# Allegro board sophum_esc_v2.brd
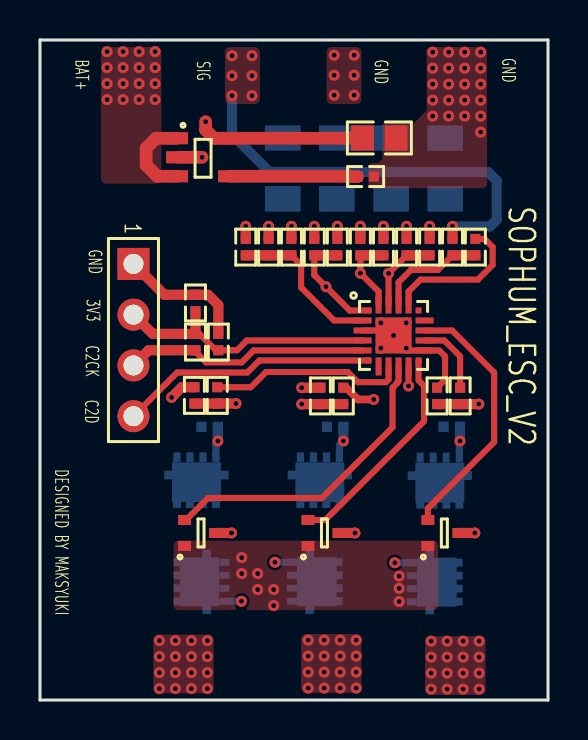
[diagram p0: board, top side]
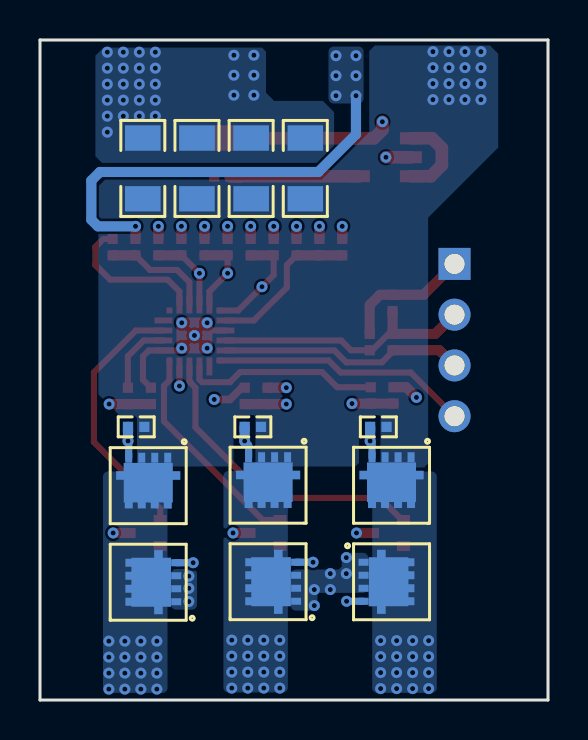
[diagram p1: board, bottom side, seen from below]

Outline 25.4 x 33.02 mm; copper layers: TOP, SIG02, GND03, BOTTOM. Coordinates in mm from the lower left corner of the outline.
Outline path: 0,33.02 0,0 25.4,0 25.4,33.02 0,33.02

## Placement (name value [footprint] x y rotation side)
C1  47uF 10%  [C1206]  14.84 26.59 90 bottom
C2  47uF 10%  [C1206]  12.14 26.59 90 bottom
C3  47uF 10%  [C1206]  17.55 26.59 90 bottom
C4  47uF 10%  [C1206]  20.26 26.59 90 bottom
C5  1nF 10%  [C0402]  16.28 26.19 0 top
C6  22uF 6.3V  [C0805]  16.97 28.12 0 top
C7  4.7uF 10%  [C0402]  7.77 19.86 270 top
C8  4.7uF 10%  [C0402]  8.92 17.91 270 top
J1  DEBUG  [HDR4X1-2R54-TM-VM]  4.67 21.82 270 top
Q1  AON7409  [DFN-3X3-5-0R50X0R35]  7.82 10.74 0 bottom
Q2  AON7409  [DFN-3X3-5-0R50X0R35]  14 10.75 0 bottom
Q3  AON7409  [DFN-3X3-5-0R50X0R35]  19.99 10.72 0 bottom
Q4  DTC143ZUAT106  [SOT-23-3-0R65X0R50]  8 8.36 270 top
Q5  DTC143ZUAT106  [SOT-23-3-0R65X0R50]  14.17 8.36 270 top
Q6  DTC143ZUAT106  [SOT-23-3-0R65X0R50]  20.17 8.36 270 top
Q7  AON7544  [DFN-3X3-5-0R50X0R35]  7.82 5.92 270 bottom
Q8  AON7544  [DFN-3X3-5-0R50X0R35]  14 5.92 90 bottom
Q9  AON7544  [DFN-3X3-5-0R50X0R35]  19.99 5.89 90 bottom
R1  4.7K 1%  [R0402]  20.62 22.66 90 top
R2  2K 1%  [R0402]  19.48 22.66 270 top
R3  2K 1%  [R0402]  17.17 22.66 270 top
R4  1K 1%  [R0402]  21.77 22.66 90 top
R5  2K 1%  [R0402]  14.87 22.66 270 top
R6  1K 1%  [R0402]  13.71 22.66 90 top
R7  1K 1%  [R0402]  16.02 22.66 90 top
R8  1K 1%  [R0402]  18.33 22.66 90 top
R9  10K 1%  [R0402]  10.29 22.66 270 top
R10  10K 1%  [R0402]  11.43 22.66 270 top
R11  10K 1%  [R0402]  12.57 22.66 270 top
R12  10K 1%  [R0402]  7.77 17.91 270 top
R13  75R 1%  [R0402]  8.48 13.67 0 bottom
R14  75R 1%  [R0402]  14.76 13.67 0 bottom
R15  75R 1%  [R0402]  20.59 13.67 0 bottom
R16  75R 1%  [R0402]  8.86 15.24 270 top
R17  75R 1%  [R0402]  15.16 15.21 270 top
R18  75R 1%  [R0402]  21.01 15.21 270 top
R19  10K 1%  [R0402]  7.72 15.24 90 top
R20  10K 1%  [R0402]  14.02 15.21 90 top
R21  10K 1%  [R0402]  19.85 15.21 90 top
U1  AP2210K-3.3TRG1  [SOT-23-5-1R10X0R60]  8.15 27.15 0 top
U2  EFM8BB21F16G  [QFN-20-0R50-3X3EP1R80X1R80]  17.68 18.24 0 top

## Library data of the parts
C1-C5 C7 C8 = CAPACITOR-NON-POL
C6 = CAPACITOR-POL
J1 = HEADER-4X1
Q1-Q3 = AON7409
Q4-Q6 = DTC143ZUAT106
Q7-Q9 = AON7544
R1-R21 = RESISTOR
U1 = AP2210K-3.3TRG1
U2 = EFM8BB21F16G

## Footprints (pads in the part's own frame, mm; a bottom-side part is the same pattern mirrored in y, then rotated)
C0402
  rect 0.51x0.51 smd: 1(-0.41,0) 2(0.41,0)
C0805
  rect 1.14x1.27 smd: 1(-0.84,0) 2(0.84,0)
C1206
  rect 1.27x1.78 smd: 1(-1.52,0) 2(1.52,0)
DFN-3X3-5-0R50X0R35
  rect 0.35x0.5 smd: 1(-0.975,-1.4) 2(-0.325,-1.4) 3(0.325,-1.4) 4(0.975,-1.4)
  custom 3.21x2.28 smd: 5(0,0)
HDR4X1-2R54-TM-VM
  rect 1.6x1.6 hole 1: 1(0,0)
  round 1.6 hole 1: 2(2.54,0) 3(5.08,0) 4(7.62,0)
QFN-20-0R50-3X3EP1R80X1R80
  rect 0.3x0.3 smd: 1(-1.25,1.25) 6(-1.25,-1.25) 11(1.25,-1.25) 16(1.25,1.25)
  rect 0.9x0.3 smd: 2(-1.55,0.75) 3(-1.55,0.25) 4(-1.55,-0.25) 5(-1.55,-0.75) 12(1.55,-0.75) 13(1.55,-0.25) 14(1.55,0.25) 15(1.55,0.75)
  rect 0.3x0.9 smd: 7(-0.75,-1.55) 8(-0.25,-1.55) 9(0.25,-1.55) 10(0.75,-1.55) 17(0.75,1.55) 18(0.25,1.55) 19(-0.25,1.55) 20(-0.75,1.55)
  rect 1.8x1.8 smd: 21(0,0)
R0402
  rect 0.51x0.51 smd: 1(-0.41,0) 2(0.41,0)
SOT-23-3-0R65X0R50
  rect 0.5x0.65 smd: 1(0.65,-0.775) 2(-0.65,-0.775) 3(0,0.775)
SOT-23-5-1R10X0R60
  rect 1.1x0.6 smd: 1(-1.3,0.95) 2(-1.3,0) 3(-1.3,-0.95) 4(1.3,-0.95) 5(1.3,0.95)

## Nets
GND: C1.2 C2.2 C3.2 C4.2 C5.2 C6.2 C7.1 C8.1 J1.1 Q4.1(E) Q5.1(E) Q6.1(E) Q7.1(S#1) Q7.2(S#2) Q7.3(S#3) Q8.1(S#1) Q8.2(S#2) Q8.3(S#3) Q9.1(S#1) Q9.2(S#2) Q9.3(S#3) R6.2 R7.2 R8.2 R19.2 R20.2 R21.2 U1.2(GND) U2.3(GND#3) U2.12(GND#12) U2.21(GND#21)
VBAT: C1.1 C2.1 C3.1 C4.1 Q1.1(S#1) Q1.2(S#2) Q1.3(S#3) Q2.1(S#1) Q2.2(S#2) Q2.3(S#3) Q3.1(S#1) Q3.2(S#2) Q3.3(S#3) R13.1 R14.1 R15.1 U1.1(VIN) U1.3(EN)
VCC_3V3: C6.1 C7.2 C8.2 J1.2 R12.1 U1.5(VOUT) U2.4(VDD)
S: R1.2
U: Q1.5(D) Q7.5(D) R2.1
V: Q2.5(D) Q8.5(D) R3.1
W: Q3.5(D) Q9.5(D) R5.1
N00617: R9.2 R10.2 R11.2 U2.2(P0.0)
N00683: R5.2 R6.1 R9.1 U2.1(P0.1)
N00695: R3.2 R7.1 R10.1 U2.20(P0.2)
N00702: R2.2 R8.1 R11.1 U2.19(P0.3)
N01197: J1.3 R12.2 U2.5(RSTB/C2CK)
N01206: J1.4 U2.6(P2.0/C2D)
N02496: C5.1 U1.4(BYP/ADJ)
N02921: Q9.4(G) R18.2 R21.1
N03269: Q3.4(G) Q6.3(C) R15.2
N05304: Q7.4(G) R16.2 R19.1
N05422: Q1.4(G) Q4.3(C) R13.2
N07149: Q8.4(G) R17.2 R20.1
N07267: Q2.4(G) Q5.3(C) R14.2
N09542: R16.1 U2.8(P1.5)
N09554: Q4.2(B) U2.9(P1.4)
N09583: R17.1 U2.10(P1.3)
N10131: Q5.2(B) U2.11(P1.2)
N10444: R18.1 U2.13(P1.1)
N10471: Q6.2(B) U2.14(P1.0)
N10995: R1.1 R4.1 U2.18(P0.4)
N10999: R4.2 U2.17(P0.5)

Pads without a net: U2 7 15 16

## Via types
v1: diameter 0.55, hole 0.254, TOP to BOTTOM, 142 vias

## Routing (per net, layer and track width the routed paths; a pad name or vN(x,y) marks a point on that pad's centre or on a via; arc(x,y) is an arc through that point)
GND: length 25.3
  TOP w0.305: v1(18.31,17.6) 18.43,17.49 U2.12 19.96,17.49 20.25,17.19 20.25,16.02 R21.2 ; U2.3 17.43,18.49 v1(17.68,18.24)
  TOP w0.508: J1.1 6.22,20.27 C7.1 8.4,20.27 8.92,19.76 C8.1 ; v1(6.58,15.14) 7.09,15.65 R19.2 ; R7.2 v1(16.02,23.7) ; R8.2 v1(18.33,23.7) ; R6.2 v1(13.71,23.7) ; R20.2 v1(13.08,15.62)
  TOP w0.635: U1.2 v1(8.1,27.15)
  SIG02 w0.152: J1.1 5.65,21.82 ; J1.1 3.7,21.82 ; J1.1 4.67,22.8 ; J1.1 4.67,20.84
  GND03 w0.635: J1.1 3.7,21.82 ; J1.1 4.67,20.84 ; J1.1 5.65,21.82 ; J1.1 4.67,22.8
  vias: v1(10.08,7.12) v1(10.08,6.32) v1(10.88,6.32) v1(10.88,5.52) v1(11.68,5.52) v1(11.68,4.72) v1(14.71,32.26) v1(14.71,31.26) v1(14.71,30.26) v1(15.71,32.26) v1(15.71,31.26) v1(15.71,30.26) v1(17.04,18.87) v1(17.04,17.6) v1(17.96,6.2) v1(17.96,5.59) v1(17.96,4.93) v1(18.31,18.87) v1(19.63,32.41) v1(19.63,31.61) v1(19.63,30.81) v1(19.63,30.01) v1(19.63,29.21) v1(20.43,32.41) v1(20.43,31.61) v1(20.43,30.81) v1(20.43,30.01) v1(20.43,29.21) v1(21.23,32.41) v1(21.23,31.61) v1(21.23,30.81) v1(21.23,30.01) v1(21.23,29.21) v1(22.03,32.41) v1(22.03,31.61) v1(22.03,30.81) v1(22.03,30.01) v1(22.03,29.21) v1(22.03,28.41)
VBAT: length 4.4
  TOP w0.635: U1.3 5.86,26.2 5.31,26.75 5.31,27.61 5.8,28.1 U1.1
  vias: v1(3.35,32.44) v1(3.35,31.64) v1(3.35,30.84) v1(3.35,30.04) v1(4.15,32.44) v1(4.15,31.64) v1(4.15,30.84) v1(4.15,30.04) v1(4.95,32.44) v1(4.95,31.64) v1(4.95,30.84) v1(4.95,30.04) v1(5.75,32.44) v1(5.75,31.64) v1(5.75,30.84) v1(5.75,30.04)
VCC_3V3: length 38.2
  TOP w0.305: U2.4 10.34,17.99 9.85,17.5 C8.2 8.79,17.5 7.97,18.32 R12.1
  TOP w0.508: J1.2 5.64,18.32 R12.1 C7.2
  TOP w0.635: C6.1 15.35,28.12 15.34,28.1 U1.5 8.7,28.1 8.28,28.52 v1(8.28,28.93)
  SIG02 w0.635: J1.2 3.43,19.28 2.59,20.12 2.59,27.74 3.78,28.93 v1(8.28,28.93)
S: length 21.1
  TOP w0.508: R1.2 v1(20.62,23.7)
  BOTTOM w0.508: v1(9.6,30.23) 9.6,28.3 11.48,26.42 22.4,26.42 22.83,25.98 22.83,24.03 22.5,23.7 v1(20.62,23.7)
  vias: v1(9.6,32.23) v1(9.6,31.23) v1(10.6,32.23) v1(10.6,31.23) v1(10.6,30.23)
U: length 29.4
  TOP w0.508: R2.1 v1(19.48,23.7)
  SIG02 w0.381: v1(6.77,2.97) 7.29,3.49 7.29,14.35 8.35,15.41 9.54,15.41 9.56,15.42 10.09,15.42 15.01,20.35 18.01,20.35 19.48,21.82 v1(19.48,23.7)
  vias: v1(5.97,2.97) v1(5.97,2.17) v1(5.97,1.37) v1(5.97,0.57) v1(6.77,2.17) v1(6.77,1.37) v1(6.77,0.57) v1(7.57,2.97) v1(7.57,2.17) v1(7.57,1.37) v1(7.57,0.57) v1(8.37,2.97) v1(8.37,2.17) v1(8.37,1.37) v1(8.37,0.57)
V: length 30.3
  TOP w0.508: R3.1 v1(17.17,23.7)
  SIG02 w0.381: v1(14.21,3) 14.21,17.51 16.26,19.56 18.31,19.56 21.22,22.46 21.22,23.94 20.68,24.49 17.96,24.49 v1(17.17,23.7)
  vias: v1(13.41,3) v1(13.41,2.2) v1(13.41,1.4) v1(13.41,0.6) v1(14.21,2.2) v1(14.21,1.4) v1(14.21,0.6) v1(15.01,3) v1(15.01,2.2) v1(15.01,1.4) v1(15.01,0.6) v1(15.81,3) v1(15.81,2.2) v1(15.81,1.4) v1(15.81,0.6)
W: length 32.1
  TOP w0.508: R5.1 v1(14.87,23.7)
  SIG02 w0.381: v1(21.96,2.95) 23.6,4.58 23.6,23.57 21.84,25.32 16.49,25.32 v1(14.87,23.7)
  vias: v1(19.56,2.95) v1(19.56,2.15) v1(19.56,1.35) v1(19.56,0.55) v1(20.36,2.95) v1(20.36,2.15) v1(20.36,1.35) v1(20.36,0.55) v1(21.16,2.95) v1(21.16,2.15) v1(21.16,1.35) v1(21.16,0.55) v1(21.96,2.15) v1(21.96,1.35) v1(21.96,0.55)
N00617: length 7.9
  TOP w0.305: R11.2 13.06,21.76 13.06,20.64 14.71,18.99 U2.2
  TOP w0.508: R9.2 R10.2 R11.2
N00683: length 11.5
  TOP w0.305: R6.1 13.71,21.26 v1(14.3,20.68) 15.49,19.49 U2.1
  TOP w0.508: R9.1 v1(10.29,23.7) ; R6.1 R5.2
  SIG02 w0.305: v1(14.3,20.68) 13.31,20.68 v1(10.29,23.7)
N00695: length 10.2
  TOP w0.305: U2.20 16.93,20.44 v1(16.02,21.35) R7.1
  TOP w0.508: R10.1 v1(11.43,23.7) ; R7.1 R3.2
  SIG02 w0.305: v1(11.43,23.7) 11.63,23.7 13.98,21.35 v1(16.02,21.35)
N00702: length 10.4
  TOP w0.305: R8.1 v1(17.43,21.35) U2.19
  TOP w0.508: R11.1 v1(12.57,23.7) ; R8.1 R2.2
  SIG02 w0.305: v1(12.57,23.7) 14.33,21.95 16.83,21.95 v1(17.43,21.35)
N01197: length 12.3
  TOP w0.305: R12.2 7.77,17.42 8.31,16.89 10.08,16.89 10.68,17.49 U2.5
  TOP w0.508: R12.2 5.43,17.5 J1.3
N01206: length 12.9
  TOP w0.305: U2.6 10.97,16.99 10.36,16.38 6.86,16.38 J1.4
N02496: length 6.4
  TOP w0.635: U1.4 15.4,26.2 15.41,26.19 C5.1
N02921: length 13.2
  TOP w0.508: R21.1 R18.2 v1(21.94,14.8)
  SIG02 w0.508: v1(21.94,14.8) 20.93,14.8 17.74,11.62 v1(17.74,6.87)
  BOTTOM w0.356: Q9.4 v1(17.74,6.87)
N03269: length 7.3
  TOP w0.508: Q6.3 v1(21.74,8.36)
  SIG02 w0.508: v1(21.74,8.36) 21.74,12.22 v1(21,12.96)
  BOTTOM w0.356: v1(21,12.96) 20.96,12.92 Q3.4
  BOTTOM w0.508: R15.2 v1(21,12.96)
N05304: length 15.6
  TOP w0.508: R19.1 R16.2 v1(9.8,14.83)
  SIG02 w0.508: v1(9.8,14.83) 9.39,14.83 9.39,14.83 8.59,14.83 8.08,14.33 8.08,5.97 9.11,4.94 v1(10.07,4.94)
  BOTTOM w0.356: Q7.4 v1(10.07,4.94)
N05422: length 7.2
  TOP w0.508: Q4.3 v1(9.58,8.36)
  SIG02 w0.508: v1(8.89,12.96) 9.58,12.28 v1(9.58,8.36)
  BOTTOM w0.356: v1(8.89,12.96) 8.8,12.86 Q1.4
  BOTTOM w0.508: R13.2 v1(8.89,12.96)
N07149: length 11.4
  TOP w0.508: R17.2 R20.1 v1(13.08,14.8)
  SIG02 w0.381: v1(13.08,14.8) 11.75,13.47 v1(11.75,6.89)
  BOTTOM w0.356: Q8.4 v1(11.75,6.89)
N07267: length 7.2
  TOP w0.508: Q5.3 v1(15.75,8.36)
  SIG02 w0.508: v1(15.17,12.96) 15.75,12.38 v1(15.75,8.36)
  BOTTOM w0.356: Q2.4 14.97,12.76 v1(15.17,12.96)
  BOTTOM w0.508: R14.2 v1(15.17,12.96)
N09542: length 9.8
  TOP w0.305: U2.8 17.43,16.03 17.29,15.9 15.9,15.9 15.39,16.41 11.3,16.41 10.54,15.65 R16.1
N09554: length 15.5
  TOP w0.305: Q4.2 7.3,9.01 8.4,10.11 14.1,10.11 17.63,13.64 17.63,15.62 17.86,15.85 17.86,15.89 17.93,15.96 U2.9
N09583: length 4.8
  TOP w0.305: U2.10 v1(18.43,15.71)
  TOP w0.381: v1(16.69,15.04) 15.9,15.04 15.31,15.62 R17.1
  SIG02 w0.508: v1(18.43,15.71) 17.75,15.04 v1(16.69,15.04)
N10131: length 11
  TOP w0.305: Q5.2 14.26,9.01 19.2,13.94 19.2,15.72 18.93,15.99 U2.11
N10444: length 3.7
  TOP w0.305: R18.1 21.01,17.2 20.21,17.99 U2.13
N10471: length 13.1
  TOP w0.305: U2.14 20.6,18.49 22.71,16.38 22.71,12.9 19.39,9.59 Q6.2
N10995: length 5.5
  TOP w0.305: R1.1 19.89,21.51 18.54,21.51 17.93,20.9 U2.18
  TOP w0.508: R1.1 R4.1
N10999: length 7.3
  TOP w0.305: U2.17 18.43,20.44 19.02,21.03 21.89,21.03 22.63,21.77 22.63,22.66 22.23,23.07 R4.2

## Copper pours and planes (outline as drawn; the poured copper is in the pictures)
GND on TOP: 16.56,25.6 16.43,25.73 16.43,26.72 16.59,26.87 16.92,26.87 17.12,27.08 17.12,28.78 17.2,28.85 18.69,28.85 19.33,29.49 19.33,32.41 19.4,32.59 19.58,32.66 22.1,32.66 22.28,32.59 22.35,32.41 22.35,25.86 22.28,25.68 22.1,25.6
GND on TOP: 6.68,4.75 6.75,4.57 6.93,4.5 19.66,4.5 19.84,4.57 19.91,4.75 19.91,7.72 19.84,7.9 19.66,7.98 6.93,7.98 6.75,7.9 6.68,7.72
GND on TOP: 14.33,30.07 14.4,29.89 14.58,29.82 15.82,29.82 16,29.89 16.08,30.07 16.08,32.41 16,32.59 15.82,32.66 14.58,32.66 14.4,32.59 14.33,32.41
GND on BOTTOM: 17.55,4.78 17.63,4.6 17.81,4.52 18.59,4.52 18.77,4.6 18.85,4.78 18.85,6.3 18.77,6.48 18.59,6.55 17.81,6.55 17.63,6.48 17.55,6.3
GND on BOTTOM: 14.3,32.64 22.23,32.64 22.63,32.23 22.63,27.2 22.3,26.87 11.1,26.87 10.69,27.28 10.69,29.41 11.25,29.97 13.69,29.97 14.1,30.38 14.1,32.44
GND on BOTTOM: 11.79,4.47 11.61,4.54 11.53,4.72 11.53,5.26 11.43,5.36 9.25,5.36 9.07,5.43 8.99,5.61 8.99,7.11 9.07,7.29 9.25,7.37 10.06,7.37 10.24,7.29 10.31,7.11 10.31,6.68 10.46,6.53 12.6,6.53 12.78,6.45 12.85,6.27 12.85,4.72 12.78,4.54 12.6,4.47
GND on SIG02, GND03: 0.26,0.26 0.26,32.76 25.14,32.76 25.14,0.26
VBAT on TOP: 3.3,25.83 3.12,25.91 3.05,26.09 3.05,32.41 3.12,32.59 3.3,32.66 5.82,32.66 6,32.59 6.07,32.41 6.07,26.09 6,25.91 5.82,25.83
VBAT on BOTTOM: 8.66,32.74 8.94,32.46 8.94,28.42 11.25,26.11 22.07,26.11 22.48,25.7 22.48,15.29 21.41,14.22 20.68,14.22 20.55,14.1 20.55,11.81 20.42,11.68 15.88,11.68 15.72,11.84 15.72,14.15 15.62,14.25 14.71,14.25 14.63,14.17 14.63,11.84 14.48,11.68 9.63,11.68 9.45,11.86 9.45,14.17 9.37,14.25 8.46,14.25 8.38,14.17 8.38,11.79 8.23,11.63 6.2,11.63 5.99,11.84 5.99,24.13 2.49,27.64 2.49,32.33 2.9,32.74
S on TOP: 9.25,30.07 9.32,29.89 9.5,29.82 10.74,29.82 10.92,29.89 11,30.07 11,32.41 10.92,32.59 10.74,32.66 9.5,32.66 9.32,32.59 9.25,32.41
S on BOTTOM: 9.22,30.1 9.29,29.92 9.47,29.84 10.72,29.84 10.9,29.92 10.97,30.1 10.97,32.44 10.9,32.62 10.72,32.69 9.47,32.69 9.29,32.62 9.22,32.44
U on TOP: 5.66,0.58 5.74,0.4 5.92,0.33 8.43,0.33 8.61,0.4 8.69,0.58 8.69,3.02 8.61,3.2 8.43,3.28 5.92,3.28 5.74,3.2 5.66,3.02
U on BOTTOM: 5.56,0.61 5.64,0.43 5.82,0.36 8.53,0.36 8.71,0.43 8.79,0.61 8.79,11.18 8.71,11.36 8.53,11.43 5.82,11.43 5.64,11.36 5.56,11.18
V on TOP: 13.06,0.61 13.13,0.43 13.31,0.36 15.82,0.36 16,0.43 16.08,0.61 16.08,3.05 16,3.23 15.82,3.3 13.31,3.3 13.13,3.23 13.06,3.05
V on BOTTOM: 13,0.64 13.08,0.46 13.26,0.38 15.98,0.38 16.16,0.46 16.23,0.64 16.23,11.2 16.16,11.38 15.98,11.46 13.26,11.46 13.08,11.38 13,11.2
W on TOP: 19.25,0.51 19.33,0.33 19.51,0.25 22.02,0.25 22.2,0.33 22.28,0.51 22.28,2.95 22.2,3.13 22.02,3.2 19.51,3.2 19.33,3.13 19.25,2.95
W on BOTTOM: 19.02,0.61 19.1,0.43 19.28,0.36 22,0.36 22.18,0.43 22.25,0.61 22.25,11.18 22.18,11.36 22,11.43 19.28,11.43 19.1,11.36 19.02,11.18

## Text on the board
Ref Des/Silkscreen Top: DESIGNED BY MAKSYUKI | BAT+ | C2D | C2CK | 3V3 | GND | SIG | SOPHUM_ESC_V2
NCLEGEND-1-4: FIGURE | SIZE | 10.0 | 39.37 | DRILL CHART: TOP to BOTTOM | ALL UNITS ARE IN MILS | PLATED | QTY | 142 | 4
